# Altium PCB ADAS_ECU_MB_revA.PcbDoc (part 4 of 5)
Units mm, origin at the board's own origin, x right, y up, seen from the top; angles counter-clockwise.
Board outline 180 x 120 mm, 6 copper layers (Top Layer, Mid Layer 1, Mid Layer 2, Mid Layer 3, Mid Layer 4, Bottom Layer), stack 1.554 mm thick; 452 components, 370 nets, 4018 pads, 80 vias.
Unrouted connection lines stored in the file: 869.
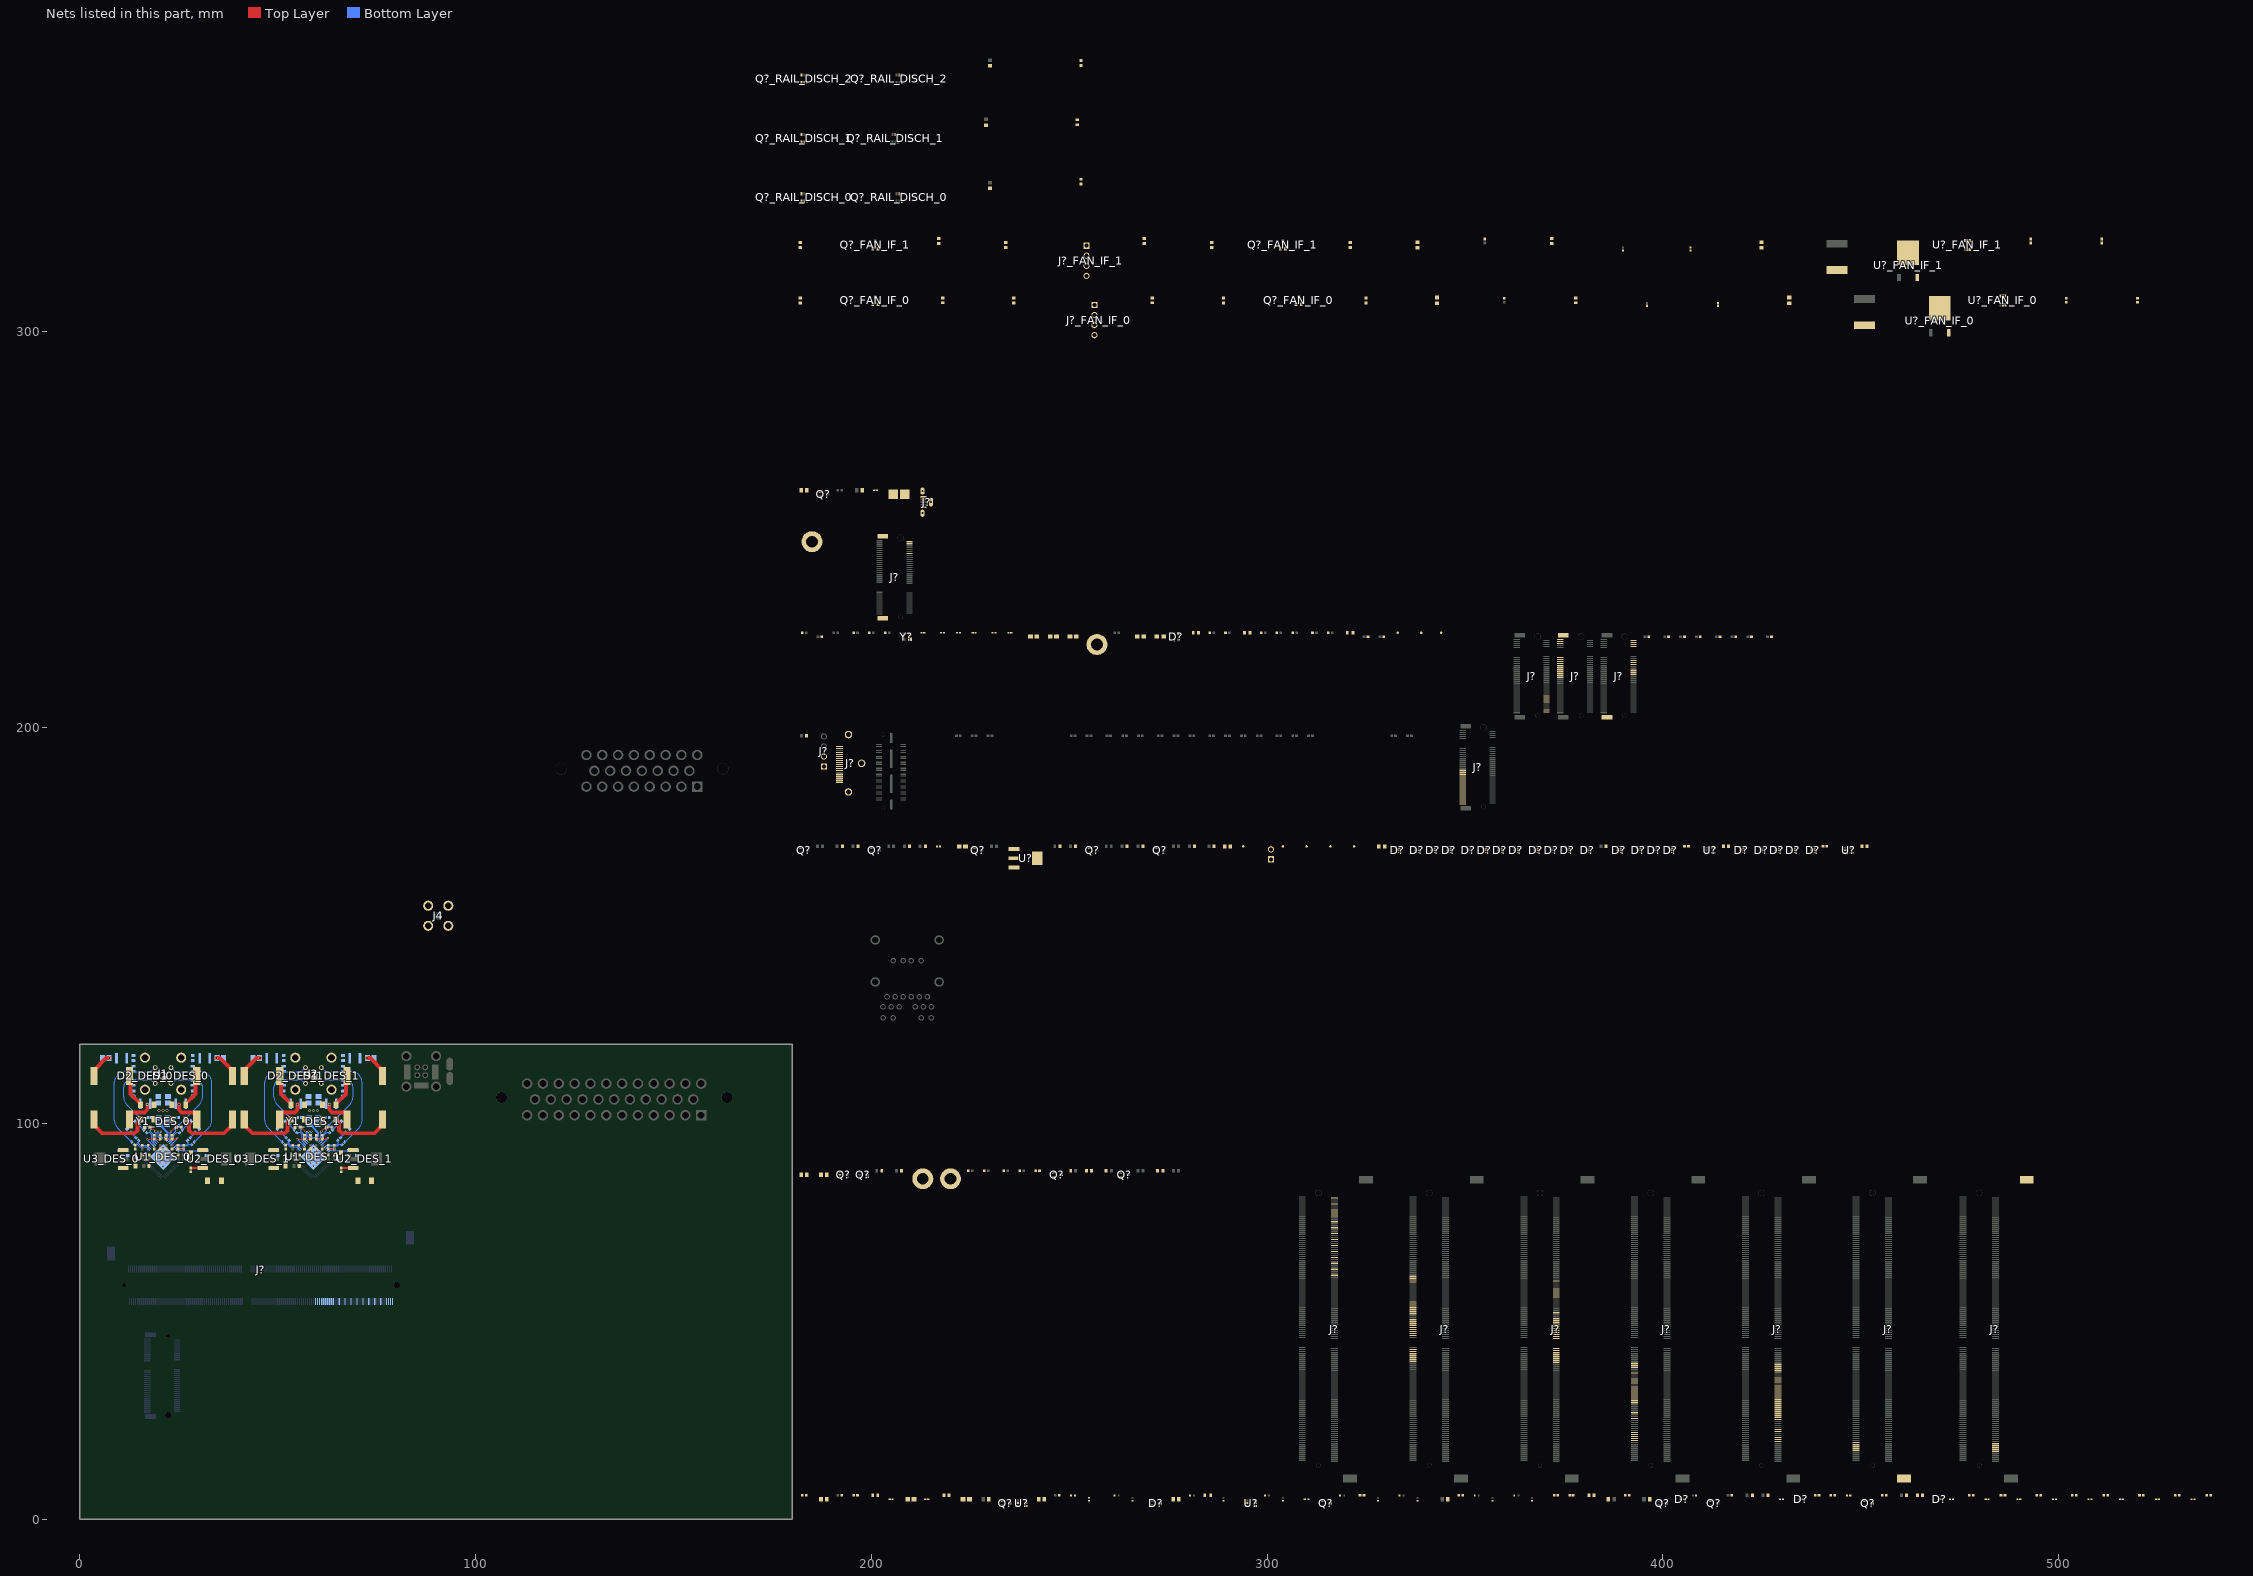
[diagram p3: the nets of this part, all layers, seen from the top]

## Via types
v1: diameter 0.5, hole 0.2, Top Layer to Bottom Layer, 32 vias
v2: diameter 0.5, hole 0.3, Top Layer to Bottom Layer, 30 vias
v3: diameter 0.7, hole 0.5, Top Layer to Bottom Layer, 16 vias
v4: diameter 1.2, hole 1.2, Top Layer to Bottom Layer, 2 vias

## Nets (pads, with @x,y where several pads share a name; then routed paths per layer and width w, separated by ;. In a path a pad name is that pad's centre, name@x,y a point inside that pad or via, vN(x,y) a via of type N, cw(c..) or ccw(c..) an arc to the next point about the centre after c; other vN are vias at no path point) (continued)
DES_3V3_DES_0: C11_DES_0.2 C11_DES_1.2 C13_DES_0.2 C13_DES_1.2 C27_DES_0.2 C27_DES_1.2 C28_DES_0.2 C28_DES_1.2 F5_DES_0.2 F5_DES_1.2 R2_DES_0.2 R2_DES_1.2 R5_DES_0.2 R5_DES_1.2 R6_DES_0.2 R6_DES_1.2 U1_DES_0.24 U1_DES_1.24 U2_DES_0.3 U2_DES_1.3 U3_DES_0.3 U3_DES_1.3 | length 12.9
  Top Layer w0.3: C27_DES_0.2@24.75,93.521 v2(26.25,93.521) ; C27_DES_1.2@62.75,93.521 v2(64.25,93.521)
  Top Layer w0.5: C11_DES_0.2@28,88.729 28.014,88.714 31.036,88.714 U2_DES_0.3@31.05,88.7 ; C11_DES_1.2@66,88.729 66.014,88.714 69.036,88.714 U2_DES_1.3@69.05,88.7
  Bottom Layer w0.254: U1_DES_0.24@24.624,93.356 25.018,93.75 25.955,93.75 26.183,93.521 v2(26.25,93.521) ; U1_DES_1.24@62.624,93.356 63.018,93.75 63.955,93.75 64.183,93.521 v2(64.25,93.521)
DP1_AUX_N: D?.4@375.583,168.5 D?.7@376.418,168.5 J?.98@373.1,57.125
DP1_AUX_P: D?.5@375.583,168 D?.6@376.418,168 J?.100@373.1,56.625
DP1_HPD: D?.2@375.583,169.5 D?.9@376.418,169.5 J?.96@373.1,57.625
DP1_TXD0_N: D?.1@432.583,170 D?.10@433.418,170 J?.63@63.5,55
DP1_TXD0_P: D?.2@432.583,169.5 D?.9@433.418,169.5 J?.65@63,55
DP1_TXD1_N: D?.4@432.583,168.5 D?.7@433.418,168.5 J?.69@62,55
DP1_TXD1_P: D?.5@432.583,168 D?.6@433.418,168 J?.71@61.5,55
DP1_TXD2_N: D?.1@401.583,170 D?.10@402.418,170 J?.75@60.5,55
DP1_TXD2_P: D?.2@401.583,169.5 D?.9@402.418,169.5 J?.77@60,55
DP1_TXD3_N: D?.4@401.583,168.5 D?.7@402.418,168.5 J?.81@336.9,61.375
DP1_TXD3_P: D?.5@401.583,168 D?.6@402.418,168 J?.83@336.9,60.875
DP_D0_N: C?.1@524.634,5
DP_D0_P: C?.1@533.634,5
DP_D1_N: C?.1@507.634,5
DP_D1_P: C?.1@515.634,5
DP_D2_N: C?.1@489.634,5
DP_D2_P: C?.1@498.634,5
DP_D3_N: C?.1@472.634,5
DP_D3_P: C?.1@481.634,5
DP_HDMI_CEC: D?.1@375.583,170 D?.10@376.418,170 J?.94@373.1,58.125
DP_HPD: Q?.3@400.95,4 R?.1@381.35,6
ENABLE_FAN_IF_0: R?_FAN_IF_0.1@378,307.375 R?_FAN_IF_0.2@520.001,308.5
ENABLE_FAN_IF_1: R?_FAN_IF_1.1@372,322.375 R?_FAN_IF_1.2@511.001,323.5
FAN_PWM_FAN_IF_0: R?_FAN_IF_0.1@218,307.375
FAN_PWM_FAN_IF_1: R?_FAN_IF_1.1@217,322.375
FAN_TACH_FAN_IF_0: R?_FAN_IF_0.1@271,307.375
FAN_TACH_FAN_IF_1: R?_FAN_IF_1.1@269,322.375
FAN_VCC_FAN_IF_0: J?_FAN_IF_0.2 U?_FAN_IF_0.2 U?_FAN_IF_0.3@486.65,306.875
FAN_VCC_FAN_IF_1: J?_FAN_IF_1.2 U?_FAN_IF_1.2 U?_FAN_IF_1.3@477.65,320.875
FAN_VDDIO_FAN_IF_0: C?.1@222.198,170 C?.1@405.522,170 C?.1@440.522,170 Q?.1@182.05,169.65 Q?.1@200.05,169.65 Q?.1@226.05,169.65 Q?.1@246.05,87.65 Q?.1@255.05,169.65 Q?.1@263.05,87.65 Q?.1@272.05,169.65 Q?_FAN_IF_0.1@307.35,307.05 Q?_FAN_IF_1.1@303.35,321.05 R?.1@182.5,6 R?.2@192.65,170 R?.2@197.725,260 R?.2@209.65,170 R?.2@247.65,170 R?.2@255.65,88 R?.2@264.65,170 R?.2@273.65,88 R?.2@281.65,170 R?.2@290.725,170 R?.2@295.65,224 R?.2@385.65,170 R?.2@416.65,170 R?.2@443.5,6 R?_FAN_IF_0.1@289,307.35 R?_FAN_IF_1.1@286,321.35 U?.2@236.05,167 U?.4@241.95,167 U?.5@412.771,169.65 U?.5@447.771,169.65
GBE_LED_ACT: J?.194@429.1,31.125
GBE_LED_LINK: J?.188@429.1,32.625
GBE_MDI0_N: D?.1@419.583,170 D?.10@420.418,170 J?.184@429.1,33.625
GBE_MDI0_P: D?.2@419.583,169.5 D?.9@420.418,169.5 J?.186@429.1,33.125
GBE_MDI1_N: D?.4@419.583,168.5 D?.7@420.418,168.5 J?.190@429.1,32.125
GBE_MDI1_P: D?.5@419.583,168 D?.6@420.418,168 J?.192@429.1,31.625
GBE_MDI2_N: D?.1@388.583,170 D?.10@389.418,170 J?.196@429.1,30.625
GBE_MDI2_P: D?.2@388.583,169.5 D?.9@389.418,169.5 J?.198@429.1,30.125
GBE_MDI3_N: D?.4@388.583,168.5 D?.7@389.418,168.5 J?.202@429.1,29.125
GBE_MDI3_P: D?.5@388.583,168 D?.6@389.418,168 J?.204@429.1,28.625
GND: C9_DES_0.1 C9_DES_1.1 C10_DES_0.1 C10_DES_1.1 C11_DES_0.1 C11_DES_1.1 C12_DES_0.2 C12_DES_1.2 C13_DES_0.1 C13_DES_1.1 C14_DES_0.2 C14_DES_1.2 C15_DES_0.1 C15_DES_1.1 C16_DES_0.1 C16_DES_1.1 C17_DES_0.1 C17_DES_1.1 C18_DES_0.1 C18_DES_1.1 C19_DES_0.1 C19_DES_1.1 C20_DES_0.1 C20_DES_1.1 C21_DES_0.1 C21_DES_1.1 C22_DES_0.1 C22_DES_1.1 C23_DES_0.1 C23_DES_1.1 C24_DES_0.1 C24_DES_1.1 C25_DES_0.1 C25_DES_1.1 C26_DES_0.1 C26_DES_1.1 C27_DES_0.1 C27_DES_1.1 C28_DES_0.1 C28_DES_1.1 C29_DES_0.1 C29_DES_1.1 C30_DES_0.1 C30_DES_1.1 C31_DES_0.2 C31_DES_1.2 C32_DES_0.2 C32_DES_1.2 C33_DES_0.2 C33_DES_1.2 C34_DES_0.2 C34_DES_1.2 C?.1@200.634,260 C?.1@204.634,5 C?.1@212.634,224 C?.1@213.634,5 C?.1@216.634,170 C?.1@217.634,224 C?.1@221.634,224 C?.1@225.634,224 C?.1@230.634,224 C?.1@234.634,224 C?.1@372.57,6 C?.1@376.57,6 C?.1@429.634,5 C?.2@187.479,223 C?.2@208.475,259 C?.2@210.802,5 C?.2@223.802,170 C?.2@224.802,5 C?.2@241.802,223 C?.2@246.802,223 C?.2@251.802,223 C?.2@310.475,5 C?.2@406.479,170 C?.2@408.4,6 C?.2@441.479,170 C?.2@447.4,6 C?_FAN_IF_0.1 C?_FAN_IF_1.1 D1_DES_0.3 D1_DES_0.8 D1_DES_1.3 D1_DES_1.8 D2_DES_0.3 D2_DES_0.8 D2_DES_1.3 D2_DES_1.8 D?.3@332.583,169 D?.3@337.583,169 D?.3@341.583,169 D?.3@345.583,169 D?.3@350.583,169 D?.3@354.583,169 D?.3@358.583,169 D?.3@362.583,169 D?.3@367.583,169 D?.3@371.583,169 D?.3@375.583,169 D?.3@380.583,169 D?.3@388.583,169 D?.3@393.583,169 D?.3@397.583,169 D?.3@401.583,169 D?.3@404.583,5 D?.3@419.583,169 D?.3@424.583,169 D?.3@428.583,169 D?.3@432.583,169 D?.3@434.583,5 D?.3@437.583,169 D?.3@469.583,5 D?.8 J1.MH1 J1.MH2 J1.MH3 J1.MH4 J1.MH5 J2.MH1 J2.MH2 J2.MH3 J2.MH4 J2.MH5 J4.2 J?.1@79,55 J?.1@188,190.19 J?.1@349.45,180.75 J?.2@191.92,194.71 J?.2@301,169.27 J?.2@317.1,81.125 J?.3@349.45,181.25 J?.5@191.92,193.21 J?.5@213.175,258.3 J?.6@212.925,254.2 J?.7@77.5,55 J?.7@212.925,259.8 J?.8@191.92,191.71 J?.8@215.075,257 J?.8@317.1,79.625 J?.9@349.45,182.75 J?.11@191.92,190.21 J?.13@76,55 J?.14@317.1,78.125 J?.15@349.45,184.25 J?.17@191.92,187.21 J?.19@74.5,55 J?.20@194.22,183.75 J?.20@317.1,76.625 J?.21@194.22,198.25 J?.21@349.45,185.75 J?.22@197.52,191 J?.25@73,55 J?.26@317.1,75.125 J?.27@349.45,187.25 J?.31@71.5,55 J?.32@317.1,73.625 J?.33@349.45,188.75 J?.37@70,55 J?.38@317.1,72.125 J?.39@374.1,213.25 J?.43@68.5,55 J?.44@317.1,70.625 J?.45@374.1,214.75 J?.49@67,55 J?.50@317.1,69.125 J?.51@374.1,216.25 J?.55@65.5,55 J?.56@317.1,67.625 J?.57@374.1,217.75 J?.61@64,55 J?.62@317.1,66.125 J?.67@62.5,55 J?.68@317.1,64.625 J?.71@374.1,221.25 J?.73@61,55 J?.73@374.1,221.75 J?.74@317.1,63.125 J?.75@374.1,222.25 J?.76@202.875,227.65 J?.76@385.875,202.65 J?.77@202.875,248.35 J?.77@374.875,223.35 J?.79@59.5,55 J?.80@317.1,61.625 J?.85@336.9,60.375 J?.86@373.1,60.125 J?.102@373.1,56.125 J?.107@336.9,54.875 J?.113@336.9,53.375 J?.119@336.9,51.875 J?.125@336.9,50.375 J?.129@336.9,49.375 J?.132@373.1,48.625 J?.135@336.9,47.875 J?.138@373.1,47.125 J?.141@336.9,46.375 J?.144@373.1,45.625 J?.146@373.1,43.125 J?.147@336.9,42.875 J?.152@373.1,41.625 J?.153@336.9,41.375 J?.158@373.1,40.125 J?.159@336.9,39.875 J?.164@429.1,38.625 J?.165@392.9,38.375 J?.170@429.1,37.125 J?.171@392.9,36.875 J?.176@429.1,35.625 J?.177@392.9,35.375 J?.200@429.1,29.625 J?.201@392.9,29.375 J?.231@392.9,21.875 J?.241@448.9,19.375 J?.242@484.101,19.125 J?.243@448.9,18.875 J?.244@484.101,18.625 J?.245@448.9,18.375 J?.246@484.101,18.125 J?.247@448.9,17.875 J?.248@484.101,17.625 J?.249@448.9,17.375 J?.250@484.101,17.125 J?.261@461,10.25 J?.262@492.001,85.75 J?_FAN_IF_0.1 J?_FAN_IF_1.1 MP?.1 Q?.1@192.05,87.65 Q?.2@187.05,258.35 Q?.2@233.05,3.35 Q?.2@399.05,3.35 Q?.4@198.95,86.35 Q?_FAN_IF_0.2@201.65,307.05 Q?_FAN_IF_1.2@201.65,321.05 Q?_RAIL_DISCH_0.1@182.35,333.05 Q?_RAIL_DISCH_0.4@207.65,334.95 Q?_RAIL_DISCH_1.1@182.35,348.05 Q?_RAIL_DISCH_1.4@206.65,349.95 Q?_RAIL_DISCH_2.1@182.35,363.05 Q?_RAIL_DISCH_2.4@207.65,364.95 R1_DES_0.1 R1_DES_1.1 R3_DES_0.1 R3_DES_1.1 R4_DES_0.1 R4_DES_1.1 R7_DES_0.1 R7_DES_1.1 R8_DES_0.1 R8_DES_1.1 R9_DES_0.1 R9_DES_1.1 R10_DES_0.1 R10_DES_1.1 R11_DES_0.1 R11_DES_1.1 R?.1@182.5,224 R?.1@182.275,87 R?.1@182.275,260 R?.1@187.275,5 R?.1@187.275,87 R?.1@195.5,224 R?.1@218.35,6 R?.1@242.275,5 R?.1@267.15,223 R?.1@272.15,223 R?.1@328.275,170 R?.1@386.275,5 R?.2@192.5,6 R?.2@242.5,88 R?.2@247.5,6 R?_FAN_IF_0.1@343,307.275 R?_FAN_IF_0.2@182,308.65 R?_FAN_IF_0.2@360,308.5 R?_FAN_IF_1.1@338,321.275 R?_FAN_IF_1.2@182,322.65 R?_FAN_IF_1.2@355,323.5 U1_DES_0.57 U1_DES_1.57 U2_DES_0.1 U2_DES_1.1 U3_DES_0.1 U3_DES_1.1 U?.1@236.05,169.3 U?.3@411.23,168.35 U?.3@446.23,168.35 U?_FAN_IF_0.4@470,306 U?_FAN_IF_1.4@462,320 Y1_DES_0.2 Y1_DES_0.4 Y1_DES_1.2 Y1_DES_1.4 Y?.2
  other v1: 21,89.167 59,89.167 20.222,89.944 21.778,89.944 58.222,89.944 59.778,89.944 19.444,90.722 21,90.722 22.556,90.722 57.444,90.722 59,90.722 60.556,90.722 18.667,91.5 20.222,91.5 21.778,91.5 23.333,91.5 56.667,91.5 58.222,91.5 59.778,91.5 61.333,91.5 19.444,92.278 21,92.278 22.556,92.278 57.444,92.278 59,92.278 60.556,92.278 20.222,93.056 21.778,93.056 58.222,93.056 59.778,93.056 21,93.833 59,93.833
GPIO08_FAN_TACH: J?.208@429.1,27.625
GPIO10_nSMB_ALERT: J?.212@429.1,26.625 R?.1@415.35,170 U?.4@412.771,168.35
GPIO14_FAN_PWM: J?.230@429.1,22.125
GPIO_01: J?.118@373.1,52.125
GPIO_02: J?.124@373.1,50.625
GPIO_03: J?.126@373.1,50.125
GPIO_04: J?.127@336.9,49.875
GPIO_05: J?.128@373.1,49.625
GPIO_06: J?.130@373.1,49.125
GPIO_07: J?.206@429.1,28.125
GPIO_09: J?.211@392.9,26.875
GPIO_11: J?.216@429.1,25.625
GPIO_12: J?.218@429.1,25.125
GPIO_13: J?.228@429.1,22.625
HDMI_1V8: R?.2@183.5,6 R?.2@196.5,6 R?.2@382.65,6
HDMI_CEC: C?.1@309.525,5 D?.1@404.583,6 D?.10@405.418,6 J?.13@191.92,189.21 R?.2@324.5,6
HDMI_CLK_N: D?.5@434.583,4 D?.6@435.418,4 J?.12@191.92,189.71 R?.2@478.5,6
HDMI_CLK_P: D?.4@434.583,4.5 D?.7@435.418,4.5 J?.10@191.92,190.71 R?.2@486.501,6
HDMI_D0_N: D?.2@434.583,5.5 D?.9@435.418,5.5 J?.9@191.92,191.21 R?.2@495.501,6
HDMI_D0_P: D?.1@434.583,6 D?.10@435.418,6 J?.7@191.92,192.21 R?.2@504.501,6
HDMI_D1_N: D?.5@469.583,4 D?.6@470.418,4 J?.6@191.92,192.71 R?.2@512.501,6
HDMI_D1_P: D?.4@469.583,4.5 D?.7@470.418,4.5 J?.4@191.92,193.71 R?.2@521.501,6
HDMI_D2_N: D?.2@469.583,5.5 D?.9@470.418,5.5 R?.2@530.501,6
HDMI_D2_P: D?.1@469.583,6 D?.10@470.418,6 J?.1@191.92,195.21 R?.2@538.501,6
HDMI_HP_DET: C?.2@377.43,6 D?.5@404.583,4 D?.6@405.418,4 J?.19@191.92,186.21 R?.2@391.5,6
HDMI_nSLEEP: R?.2@243.725,5 U?.5@297.125,4
HDMI_SCL: D?.2@404.583,5.5 D?.9@405.418,5.5 J?.15@191.92,188.21 R?.2@417.5,6
HDMI_SDA: D?.4@404.583,4.5 D?.7@405.418,4.5 J?.16@191.92,187.71 R?.2@456.5,6
I2C0_SCL: D?.4@354.583,168.5 D?.7@355.418,168.5 J?.185@392.9,33.375
I2C0_SDA: D?.5@354.583,168 D?.6@355.418,168 J?.187@392.9,32.875
I2C1_SCL: J?.189@392.9,32.375
I2C1_SDA: J?.191@392.9,31.875
I2C_IO_VCC: C?.2@430.367,5 Q?.1@412.05,4.65 Q?.1@451.05,4.65 R?.1@438.5,6 R?.1@442.5,6 R?.2@422.65,6 R?.2@461.65,6
I2S0_DIN: D?.2@332.583,169.5 D?.9@333.418,169.5 J?.195@392.9,30.875 TP?.1@322,170
I2S0_DOUT: D?.1@332.583,170 D?.10@333.418,170 J?.193@392.9,31.375 TP?.1@316,170
I2S0_FS: D?.4@332.583,168.5 D?.7@333.418,168.5 J?.197@392.9,30.375 TP?.1@304,170
I2S0_SCLK: D?.5@332.583,168 D?.6@333.418,168 J?.199@392.9,29.875 TP?.1@294,170
INT_VCC: F?_FAN_IF_0.1 F?_FAN_IF_1.1
MFP6_DES_0: R5_DES_0.1 R7_DES_0.2 U1_DES_0.25 | length 7.3
  Bottom Layer w0.2: U1_DES_0.25@24.977,93.003 25.225,93.25 25.733,93.25 25.962,93.021 27.729,93.021 29.871,93.021 R7_DES_0.2@30,93.15 R5_DES_0.1@32,93.15
MFP6_DES_1: R5_DES_1.1 R7_DES_1.2 U1_DES_1.25 | length 7.3
  Bottom Layer w0.2: U1_DES_1.25@62.977,93.003 63.225,93.25 63.733,93.25 63.962,93.021 65.729,93.021 67.871,93.021 R7_DES_1.2@68,93.15 R5_DES_1.1@70,93.15
MODULE_ID: J?.217@392.9,25.375 R?.1@241.5,88
nERRB_DES_0: U1_DES_0.14 | length 1.7
  Bottom Layer w0.2: v2(20.5,98) 20.5,97.919 20.25,97.669 20.25,96.86 20.558,96.552 U1_DES_0.14@20.558,96.538
nERRB_DES_1: U1_DES_1.14 | length 1.7
  Bottom Layer w0.2: v2(58.5,98) 58.5,97.919 58.25,97.669 58.25,96.86 58.558,96.552 U1_DES_1.14@58.558,96.538
NetC3_DES_0_2: C3_DES_0.2 R3_DES_0.2 | length 1.9
  Bottom Layer w0.199: C3_DES_0.2@27.838,96.338 R3_DES_0.2@29.162,97.662
NetC3_DES_1_2: C3_DES_1.2 R3_DES_1.2 | length 1.9
  Bottom Layer w0.199: C3_DES_1.2@65.838,96.338 R3_DES_1.2@67.162,97.662
NetC4_DES_0_2: C4_DES_0.2 R4_DES_0.2 | length 1.9
  Bottom Layer w0.199: C4_DES_0.2@25.838,98.338 R4_DES_0.2@27.162,99.662
NetC4_DES_1_2: C4_DES_1.2 R4_DES_1.2 | length 1.9
  Bottom Layer w0.199: C4_DES_1.2@63.838,98.338 R4_DES_1.2@65.162,99.662
NetC7_DES_0_2: C7_DES_0.2 R9_DES_0.2 | length 1.9
  Bottom Layer w0.199: R9_DES_0.2@14.838,99.662 C7_DES_0.2@16.162,98.338
NetC7_DES_1_2: C7_DES_1.2 R9_DES_1.2 | length 1.9
  Bottom Layer w0.199: R9_DES_1.2@52.838,99.662 C7_DES_1.2@54.162,98.338
NetC8_DES_0_2: C8_DES_0.2 R10_DES_0.2 | length 1.9
  Bottom Layer w0.199: R10_DES_0.2@12.838,97.662 C8_DES_0.2@14.162,96.338
NetC8_DES_1_2: C8_DES_1.2 R10_DES_1.2 | length 1.9
  Bottom Layer w0.199: R10_DES_1.2@50.838,97.662 C8_DES_1.2@52.162,96.338
NetC15_DES_0_2: C15_DES_0.2 C16_DES_0.2 U1_DES_0.8 | length 5.4
  Top Layer w0.3: v2(17,96) 17.011,96.011 20.239,96.011 C15_DES_0.2@20.25,96.021
  Bottom Layer w0.254: v2(17,96) 17.047,95.953 17.047,95.806 U1_DES_0.8@18.437,94.417
NetC15_DES_1_2: C15_DES_1.2 C16_DES_1.2 U1_DES_1.8 | length 5.4
  Top Layer w0.3: v2(55,96) 55.011,96.011 58.239,96.011 C15_DES_1.2@58.25,96.021
  Bottom Layer w0.254: v2(55,96) 55.047,95.953 55.047,95.806 U1_DES_1.8@56.437,94.417
NetC17_DES_0_2: C17_DES_0.2 C18_DES_0.2 U1_DES_0.20 | length 5.2
  Top Layer w0.3: C17_DES_0.2@21.75,96.021 24.036,96.021 24.277,96.262 24.662,96.262 v2(24.7,96.3)
  Bottom Layer w0.254: U1_DES_0.20@23.21,94.77 23.21,94.773 24.7,96.263 v2(24.7,96.3)
NetC17_DES_1_2: C17_DES_1.2 C18_DES_1.2 U1_DES_1.20 | length 5.2
  Top Layer w0.3: C17_DES_1.2@59.75,96.021 62.036,96.021 62.277,96.262 62.662,96.262 v2(62.7,96.3)
  Bottom Layer w0.254: U1_DES_1.20@61.21,94.77 61.21,94.773 62.7,96.263 v2(62.7,96.3)
NetC31_DES_0_1: C31_DES_0.1 L1_DES_0.2 L2_DES_0.1 R12_DES_0.2 | length 6.7
  Top Layer w1: v3(34.5,116.5) 35.4,116.5 38.5,113.4 L1_DES_0.2@38.5,112
NetC31_DES_1_1: C31_DES_1.1 L1_DES_1.2 L2_DES_1.1 R12_DES_1.2 | length 6.7
  Top Layer w1: v3(72.5,116.5) 73.4,116.5 76.5,113.4 L1_DES_1.2@76.5,112
NetC32_DES_0_1: C32_DES_0.1 L4_DES_0.2 L5_DES_0.1 R13_DES_0.2 | length 7.6
  Top Layer w1: v3(25,104.75) 25,103.5 25.7,102.8 29.1,102.8 29.5,102.4 L4_DES_0.2@29.5,101
NetC32_DES_1_1: C32_DES_1.1 L4_DES_1.2 L5_DES_1.1 R13_DES_1.2 | length 7.6
  Top Layer w1: v3(63,104.75) 63,103.5 63.7,102.8 67.1,102.8 67.5,102.4 L4_DES_1.2@67.5,101
NetC33_DES_0_1: C33_DES_0.1 L7_DES_0.2 L8_DES_0.1 R14_DES_0.2 | length 6.7
  Top Layer w1: L7_DES_0.2@3.5,112 3.5,113.4 6.6,116.5 v3(7.5,116.5)
NetC33_DES_1_1: C33_DES_1.1 L7_DES_1.2 L8_DES_1.1 R14_DES_1.2 | length 6.7
  Top Layer w1: L7_DES_1.2@41.5,112 41.5,113.4 44.6,116.5 v3(45.5,116.5)
NetC34_DES_0_1: C34_DES_0.1 L10_DES_0.2 L11_DES_0.1 R15_DES_0.2 | length 7.6
  Top Layer w1: L10_DES_0.2@12.5,101 12.5,102.4 12.9,102.8 16.3,102.8 17,103.5 v3(17,104.75)
NetC34_DES_1_1: C34_DES_1.1 L10_DES_1.2 L11_DES_1.1 R15_DES_1.2 | length 7.6
  Top Layer w1: L10_DES_1.2@50.5,101 50.5,102.4 50.9,102.8 54.3,102.8 55,103.5 v3(55,104.75)
NetC?_1: C?.1@446.6,6 Q?.3@452.95,4 R?.1@455.5,6 R?.1@464.375,6
NetC?_2: C?.2@373.43,6 R?.1@390.5,6 R?.2@396.725,5
NetC?_FAN_IF_0_2: C?_FAN_IF_0.2@414,307.367 R?_FAN_IF_0.1@502.001,307.5 R?_FAN_IF_0.2@432,308.725 U?_FAN_IF_0.3@472.28,299.8 U?_FAN_IF_0.4@486.65,309.125
NetC?_FAN_IF_1_2: C?_FAN_IF_1.2@407,321.367 R?_FAN_IF_1.1@493.001,322.5 R?_FAN_IF_1.2@425,322.725 U?_FAN_IF_1.3@464.28,313.8 U?_FAN_IF_1.4@477.65,323.125
NetD?_1: D?.1@276.55,223.8 R?.2@273.85,223
NetD?_2: D?.2@271.05,3.35 R?.1@284.275,6
NetD?_3: D?.3@272.95,4 Q?.3@315.95,4 R?.1@323.5,6
NetD?_4: D?.4@277.45,223.8 R?.2@268.85,223
NetF1_DES_0_2: F1_DES_0.2 L1_DES_0.1 | length 8.4
  Top Layer w1: F1_DES_0.2@26.725,104.75 26.725,104.95 29.239,107.464 29.239,111.739 L1_DES_0.1@29.5,112
NetF1_DES_1_2: F1_DES_1.2 L1_DES_1.1 | length 8.4
  Top Layer w1: F1_DES_1.2@64.725,104.75 64.725,104.95 67.239,107.464 67.239,111.739 L1_DES_1.1@67.5,112
NetF2_DES_0_2: F2_DES_0.2 L4_DES_0.1 | length 16.7
  Top Layer w1: F2_DES_0.2@26.725,101 26.725,100.8 26.85,100.675 26.914,100.675 27.5,100.089 27.5,98.25 28.25,97.5 36.4,97.5 38.5,99.6 L4_DES_0.1@38.5,101
NetF2_DES_1_2: F2_DES_1.2 L4_DES_1.1 | length 16.7
  Top Layer w1: F2_DES_1.2@64.725,101 64.725,100.8 64.85,100.675 64.914,100.675 65.5,100.089 65.5,98.25 66.25,97.5 74.4,97.5 76.5,99.6 L4_DES_1.1@76.5,101
NetF3_DES_0_2: F3_DES_0.2 L7_DES_0.1 | length 8.4
  Top Layer w1: L7_DES_0.1@12.5,112 12.761,111.739 12.761,107.464 15.275,104.95 F3_DES_0.2@15.275,104.75
NetF3_DES_1_2: F3_DES_1.2 L7_DES_1.1 | length 8.4
  Top Layer w1: L7_DES_1.1@50.5,112 50.761,111.739 50.761,107.464 53.275,104.95 F3_DES_1.2@53.275,104.75
NetF4_DES_0_2: F4_DES_0.2 L10_DES_0.1 | length 16.7
  Top Layer w1: L10_DES_0.1@3.5,101 3.5,99.6 5.6,97.5 13.75,97.5 14.5,98.25 14.5,100.089 15.086,100.675 15.15,100.675 15.275,100.8 F4_DES_0.2@15.275,101
NetF4_DES_1_2: F4_DES_1.2 L10_DES_1.1 | length 16.7
  Top Layer w1: L10_DES_1.1@41.5,101 41.5,99.6 43.6,97.5 51.75,97.5 52.5,98.25 52.5,100.089 53.086,100.675 53.15,100.675 53.275,100.8 F4_DES_1.2@53.275,101
NetFB?_1: FB?.1 Q?.3@234.95,4
NetFB?_2: FB?.2@255,5.4 R?.2@251.513,6
NetJ?_2: J?.2@188,192.73 R?.2@183.625,198
NetJ?_62: J?.62@209.65,244
NetJ?_68: J?.68@392.65,220.5 R?.1@320.275,224
NetL2_DES_0_2: L2_DES_0.2 L3_DES_0.1 R12_DES_0.1
NetL2_DES_1_2: L2_DES_1.2 L3_DES_1.1 R12_DES_1.1
NetL5_DES_0_2: L5_DES_0.2 L6_DES_0.1 R13_DES_0.1
NetL5_DES_1_2: L5_DES_1.2 L6_DES_1.1 R13_DES_1.1
NetL8_DES_0_2: L8_DES_0.2 L9_DES_0.1 R14_DES_0.1
NetL8_DES_1_2: L8_DES_1.2 L9_DES_1.1 R14_DES_1.1
NetL11_DES_0_2: L11_DES_0.2 L12_DES_0.1 R15_DES_0.1
NetL11_DES_1_2: L11_DES_1.2 L12_DES_1.1 R15_DES_1.1
NetQ?_1: Q?.1@314.05,4.65 R?.2@345.725,5 R?.2@349.5,6
NetQ?_2: Q?.2@192.05,87 R?.2@183.725,87 R?.2@202.625,88
NetQ?_3: Q?.3@247.95,87 R?.1@250.375,88 R?.1@259.35,88
NetQ?_5: Q?.5@198.95,87 R?.2@188.725,87 R?.2@207.625,88
NetQ?_FAN_IF_0_1: Q?_FAN_IF_0.1@200.35,307.05 R?_FAN_IF_0.1@182,307.35 R?_FAN_IF_0.2@218,308.625
NetQ?_FAN_IF_0_2: Q?_FAN_IF_0.2@308.65,307.05 R?_FAN_IF_0.2@271,308.625 R?_FAN_IF_0.2@289,308.65
NetQ?_FAN_IF_1_1: Q?_FAN_IF_1.1@200.35,321.05 R?_FAN_IF_1.1@182,321.35 R?_FAN_IF_1.2@217,323.625
NetQ?_FAN_IF_1_2: Q?_FAN_IF_1.2@304.65,321.05 R?_FAN_IF_1.2@269,323.625 R?_FAN_IF_1.2@286,322.65
NetQ?_RAIL_DISCH_0_3: Q?_RAIL_DISCH_0.3@207.65,333.05 R?_RAIL_DISCH_0.1@253,337.375
NetQ?_RAIL_DISCH_0_5: Q?_RAIL_DISCH_0.5@207,334.95 Q?_RAIL_DISCH_0.6@182.35,334.95 R?_RAIL_DISCH_0.1@230,336.275
NetQ?_RAIL_DISCH_1_3: Q?_RAIL_DISCH_1.3@206.65,348.05 R?_RAIL_DISCH_1.1@252,352.375
NetQ?_RAIL_DISCH_1_5: Q?_RAIL_DISCH_1.5@206,349.95 Q?_RAIL_DISCH_1.6@182.35,349.95 R?_RAIL_DISCH_1.1@229,352.275
NetQ?_RAIL_DISCH_2_3: Q?_RAIL_DISCH_2.3@207.65,363.05 R?_RAIL_DISCH_2.1@253,367.375
NetQ?_RAIL_DISCH_2_5: Q?_RAIL_DISCH_2.5@207,364.95 Q?_RAIL_DISCH_2.6@182.35,364.95 R?_RAIL_DISCH_2.1@230,367.275
NetR1_DES_0_2: R1_DES_0.2 U1_DES_0.17 | length 4.3
  Top Layer w0.2: v2(23,98) 23.65,98.65 24.05,98.65 24.35,98.95 R1_DES_0.2@24.35,99
  Bottom Layer w0.2: U1_DES_0.17@22.149,95.831 22.8,96.482 22.8,97.733 23,97.933 v2(23,98)
NetR1_DES_1_2: R1_DES_1.2 U1_DES_1.17 | length 4.3
  Top Layer w0.2: v2(61,98) 61.65,98.65 62.05,98.65 62.35,98.95 R1_DES_1.2@62.35,99
  Bottom Layer w0.2: U1_DES_1.17@60.149,95.831 60.8,96.482 60.8,97.733 61,97.933 v2(61,98)
NetR?_1: R?.1@276.275,5 U?.6@297.125,4.65
NetR?_2: R?.2@188.725,5 R?.2@201.625,6 U?.5@239.125,4
NetR?_FAN_IF_0_1: R?_FAN_IF_0.1@432,307.275 U?_FAN_IF_0.6
NetR?_FAN_IF_0_2: R?_FAN_IF_0.2@343,308.725 R?_FAN_IF_0.2@378,308.625 U?_FAN_IF_0.5
NetR?_FAN_IF_1_1: R?_FAN_IF_1.1@425,321.275 U?_FAN_IF_1.6
NetR?_FAN_IF_1_2: R?_FAN_IF_1.2@338,322.725 R?_FAN_IF_1.2@372,323.625 U?_FAN_IF_1.5
nFORCE_RECOVERY: J?.1@301,166.73 J?.214@429.1,26.125 R?.1@289.275,170
nLOCK_DES_0: U1_DES_0.13 | length 2
  Bottom Layer w0.2: v2(19.75,98) 19.75,96.639 U1_DES_0.13@20.205,96.185
nLOCK_DES_1: U1_DES_1.13 | length 2
  Bottom Layer w0.2: v2(57.75,98) 57.75,96.639 U1_DES_1.13@58.205,96.185
nMOD_SLEEP: J?.178@429.1,35.125
nPWDN_DES_0: R2_DES_0.1 U1_DES_0.11 | length 4.5
  Top Layer w0.2: R2_DES_0.1@17.65,99 17.65,98.95 17.95,98.65 18.35,98.65 v2(19,98)
  Bottom Layer w0.2: v2(19,98) 19,97.919 19.25,97.669 19.25,95.725 U1_DES_0.11@19.497,95.477
nPWDN_DES_1: R2_DES_1.1 U1_DES_1.11 | length 4.5
  Top Layer w0.2: R2_DES_1.1@55.65,99 55.65,98.95 55.95,98.65 56.35,98.65 v2(57,98)
  Bottom Layer w0.2: v2(57,98) 57,97.919 57.25,97.669 57.25,95.725 U1_DES_1.11@57.497,95.477
nSHUTDOWN_REQ: J?.233@392.9,21.375
nSYS_RESET: J?.239@392.9,19.875
PCIE0_CLK_N: D?.1@345.583,170 D?.10@346.418,170 J?.160@373.1,39.625
PCIE0_CLK_P: D?.2@345.583,169.5 D?.9@346.418,169.5 J?.162@429.1,39.125
PCIE0_nCLKREQ: J?.180@429.1,34.625
PCIE0_nRST: D?.2@354.583,169.5 D?.9@355.418,169.5 J?.181@392.9,34.375
PCIE0_RX0_N: D?.1@358.583,170 D?.10@359.418,170 J?.131@336.9,48.875
PCIE0_RX0_P: D?.2@358.583,169.5 D?.9@359.418,169.5 J?.133@336.9,48.375
PCIE0_RX1_N: D?.4@358.583,168.5 D?.7@359.418,168.5 J?.137@336.9,47.375
PCIE0_RX1_P: D?.5@358.583,168 D?.6@359.418,168 J?.139@336.9,46.875
PCIE0_RX2_N: D?.4@337.583,168.5 D?.7@338.418,168.5 J?.149@336.9,42.375
PCIE0_RX2_P: D?.5@337.583,168 D?.6@338.418,168 J?.151@336.9,41.875
PCIE0_RX3_N: D?.1@341.583,170 D?.10@342.418,170 J?.155@336.9,40.875
PCIE0_RX3_P: D?.2@341.583,169.5 D?.9@342.418,169.5 J?.157@336.9,40.375
PCIE0_TX0_N: D?.1@367.583,170 D?.10@368.418,170 J?.134@373.1,48.125
PCIE0_TX0_P: D?.2@367.583,169.5 D?.9@368.418,169.5 J?.136@373.1,47.625
PCIE0_TX1_N: D?.4@367.583,168.5 D?.7@368.418,168.5 J?.140@373.1,46.625
PCIE0_TX1_P: D?.5@367.583,168 D?.6@368.418,168 J?.142@373.1,46.125
PCIE0_TX2_N: D?.1@362.583,170 D?.10@363.418,170 J?.148@373.1,42.625
PCIE0_TX2_P: D?.2@362.583,169.5 D?.9@363.418,169.5 J?.150@373.1,42.125
PCIE0_TX3_N: D?.4@362.583,168.5 D?.7@363.418,168.5 J?.154@373.1,41.125
PCIE0_TX3_P: D?.5@362.583,168 D?.6@363.418,168 J?.156@373.1,40.625
PCIE_32K_CLK: R?.1@450.35,170 U?.4@447.771,168.35
PCIE_CLKREQ: J?.52@392.65,216.5 R?.1@311.5,224
PCIE_RST: J?.50@392.65,216 R?.1@281.35,224 R?.1@315.5,224
PCIE_RX0_N: J?.41@374.1,213.75
PCIE_RX0_P: J?.43@374.1,214.25
PCIE_RX1_N: J?.29@349.45,187.75
PCIE_RX1_P: J?.31@349.45,188.25
PCIE_RX2_N: J?.17@349.45,184.75
PCIE_RX2_P: J?.19@349.45,185.25
PCIE_RX3_N: J?.5@349.45,181.75
PCIE_RX3_P: J?.7@349.45,182.25
PCIE_WAKE: D?.1@354.583,170 D?.10@355.418,170 J?.179@392.9,34.875
PLDWN_1: C?.2@534.367,5 R?.1@362.488,6 R?.1@537.501,6
PLDWN_2: C?.2@525.367,5 R?.1@352.488,6 R?.1@529.501,6
PLDWN_3: C?.2@516.367,5 R?.1@333.488,6 R?.1@520.501,6
PLDWN_4: C?.2@508.367,5 R?.1@318.488,6 R?.1@511.501,6
PLDWN_5: C?.2@499.367,5 R?.1@299.488,6 R?.1@503.501,6
PLDWN_6: C?.2@490.367,5 R?.1@280.488,6 R?.1@494.501,6
PLDWN_7: C?.2@482.367,5 R?.1@261.488,6 R?.1@485.501,6
PLDWN_8: C?.2@473.367,5 R?.1@250.488,6 R?.1@477.5,6
PMIC_BBAT: J?.235@392.9,20.875 TP?.1@310,170
PoC_A_DES_0: C1_DES_0.2 D1_DES_0.1 D1_DES_0.10 J1.2 L3_DES_0.2 | length 29
  Bottom Layer w0.199: J1.2@23,114.09 23.388,113.702 ccw(c25.083,115.396) D1_DES_0.10@25.083,113 D1_DES_0.1@25.918,113 28.222,113 ccw(c28.222,113.393) L3_DES_0.2@28.5,113.115 30.533,113.115 cw(c30.533,110.575) 32.329,112.371 32.556,112.144 cw(c30.76,110.348) 33.3,110.348 33.3,100.731 cw(c30.76,100.731) 32.556,98.935 C1_DES_0.2@28.899,95.278
PoC_A_DES_1: C1_DES_1.2 D1_DES_1.1 D1_DES_1.10 J2.2 L3_DES_1.2 | length 29
  Bottom Layer w0.199: J2.2@61,114.09 61.388,113.702 ccw(c63.083,115.396) D1_DES_1.10@63.083,113 D1_DES_1.1@63.918,113 66.222,113 ccw(c66.222,113.393) L3_DES_1.2@66.5,113.115 68.533,113.115 cw(c68.533,110.575) 70.329,112.371 70.556,112.144 cw(c68.76,110.348) 71.3,110.348 71.3,100.731 cw(c68.76,100.731) 70.556,98.935 C1_DES_1.2@66.899,95.278
PoC_B_DES_0: C2_DES_0.2 D1_DES_0.5 D1_DES_0.6 J1.1 L6_DES_0.2 | length 21.5
  Bottom Layer w0.199: J1.1@23,110.09 23.166,110.256 cw(c24.962,108.46) 24.962,111 D1_DES_0.6@25.083,111 D1_DES_0.5@25.918,111 28.222,111 cw(c28.222,110.607) L6_DES_0.2@28.5,110.885 29.371,110.885 cw(c29.371,109.329) 30.47,110.43 30.472,110.428 cw(c29.193,109.151) 31,109.151 31,106.673 cw(c28.46,106.673) 30.256,104.877 C2_DES_0.2@24.778,99.399
PoC_B_DES_1: C2_DES_1.2 D1_DES_1.5 D1_DES_1.6 J2.1 L6_DES_1.2 | length 21.5
  Bottom Layer w0.199: J2.1@61,110.09 61.166,110.256 cw(c62.962,108.46) 62.962,111 D1_DES_1.6@63.083,111 D1_DES_1.5@63.918,111 66.222,111 cw(c66.222,110.607) L6_DES_1.2@66.5,110.885 67.371,110.885 cw(c67.371,109.329) 68.47,110.43 68.472,110.428 cw(c67.193,109.151) 69,109.151 69,106.673 cw(c66.46,106.673) 68.256,104.877 C2_DES_1.2@62.778,99.399
PoC_C_DES_0: C5_DES_0.2 D2_DES_0.1 D2_DES_0.10 J1.4 L12_DES_0.2 | length 21.5
  Bottom Layer w0.199: C5_DES_0.2@17.222,99.399 11.744,104.877 cw(c13.54,106.673) 11,106.673 11,109.151 cw(c12.807,109.151) 11.528,110.428 11.53,110.43 cw(c12.629,109.329) 12.629,110.885 L12_DES_0.2@13.5,110.885 cw(c13.778,110.607) 13.778,111 D2_DES_0.1@16.083,111 D2_DES_0.10@16.918,111 17.038,111 cw(c17.038,108.46) 18.834,110.256 J1.4@19,110.09
PoC_C_DES_1: C5_DES_1.2 D2_DES_1.1 D2_DES_1.10 J2.4 L12_DES_1.2 | length 21.5
  Bottom Layer w0.199: C5_DES_1.2@55.222,99.399 49.744,104.877 cw(c51.54,106.673) 49,106.673 49,109.151 cw(c50.807,109.151) 49.528,110.428 49.53,110.43 cw(c50.629,109.329) 50.629,110.885 L12_DES_1.2@51.5,110.885 cw(c51.778,110.607) 51.778,111 D2_DES_1.1@54.083,111 D2_DES_1.10@54.918,111 55.038,111 cw(c55.038,108.46) 56.834,110.256 J2.4@57,110.09
PoC_D_DES_0: C6_DES_0.2 D2_DES_0.5 D2_DES_0.6 J1.3 L9_DES_0.2 | length 29
  Bottom Layer w0.199: C6_DES_0.2@13.101,95.278 9.444,98.935 cw(c11.24,100.731) 8.7,100.731 8.7,110.348 cw(c11.24,110.348) 9.444,112.144 9.671,112.371 cw(c11.467,110.575) 11.467,113.115 L9_DES_0.2@13.5,113.115 ccw(c13.778,113.393) 13.778,113 D2_DES_0.5@16.083,113 D2_DES_0.6@16.918,113 ccw(c16.917,115.396) 18.612,113.702 J1.3@19,114.09
PoC_D_DES_1: C6_DES_1.2 D2_DES_1.5 D2_DES_1.6 J2.3 L9_DES_1.2 | length 29
  Bottom Layer w0.199: C6_DES_1.2@51.101,95.278 47.444,98.935 cw(c49.24,100.731) 46.7,100.731 46.7,110.348 cw(c49.24,110.348) 47.444,112.144 47.671,112.371 cw(c49.467,110.575) 49.467,113.115 L9_DES_1.2@51.5,113.115 ccw(c51.778,113.393) 51.778,113 D2_DES_1.5@54.083,113 D2_DES_1.6@54.918,113 ccw(c54.918,115.396) 56.612,113.702 J2.3@57,114.09
PoC_PWR_DES_0: F1_DES_0.1 F2_DES_0.1 F3_DES_0.1 F4_DES_0.1
  other v3: 20,103.25 21,103.25 22,103.25
PoC_PWR_DES_1: F1_DES_1.1 F2_DES_1.1 F3_DES_1.1 F4_DES_1.1
  other v3: 58,103.25 59,103.25 60,103.25
POWER_EN: J?.237@392.9,20.375
PRE_CLK_N: C?.2@329.479,223 J?.53@374.1,216.75
PRE_CLK_P: C?.2@325.479,223 J?.55@374.1,217.25
PRE_CSI0_D1_N: D?.1@393.583,170 D?.10@394.418,170 J?.16@317.1,77.625 R?.1@237.5,88
PRE_CSI0_D1_P: D?.2@393.583,169.5 D?.9@394.418,169.5 J?.18@317.1,77.125 R?.1@233.5,88
PRE_CSI1_D0_N: D?.1@428.583,170 D?.10@429.418,170 J?.3@78.5,55 R?.1@228.5,88
PRE_CSI1_D0_P: D?.2@428.583,169.5 D?.9@429.418,169.5 J?.5@78,55 R?.1@224.5,88
PRE_FAN_PWM_FAN_IF_0: J?_FAN_IF_0.4 Q?_FAN_IF_0.3@201,308.95 R?_FAN_IF_0.2@236,308.65
PRE_FAN_PWM_FAN_IF_1: J?_FAN_IF_1.4 Q?_FAN_IF_1.3@201,322.95 R?_FAN_IF_1.2@234,322.65
PRE_FAN_TACH_FAN_IF_0: J?_FAN_IF_0.3 Q?_FAN_IF_0.3@308,308.95 R?_FAN_IF_0.2@325,308.65
PRE_FAN_TACH_FAN_IF_1: J?_FAN_IF_1.3 Q?_FAN_IF_1.3@304,322.95 R?_FAN_IF_1.2@321,322.65
PRE_PCIE_32K_CLK: J?.210@429.1,27.125 U?.2@446.23,169
PRE_PCIE_WAKE: J?.54@392.65,217 R?.1@306.5,224
PRE_TX0_N: C?.2@401.479,223 J?.47@374.1,215.25
PRE_TX0_P: C?.2@396.479,223 J?.49@374.1,215.75
PRE_TX1_N: C?.2@409.479,223 J?.35@349.45,189.25
PRE_TX1_P: C?.2@405.479,223 J?.37@374.1,212.75
PRE_TX2_N: C?.2@418.479,223 J?.23@349.45,186.25
PRE_TX2_P: C?.2@414.479,223 J?.25@349.45,186.75
PRE_TX3_N: C?.2@427.479,223 J?.11@349.45,183.25
PRE_TX3_P: C?.2@422.479,223 J?.13@349.45,183.75
RAIL_ENABLE_RAIL_DISCH_0: Q?_RAIL_DISCH_0.2@183,333.05
RAIL_ENABLE_RAIL_DISCH_1: Q?_RAIL_DISCH_1.2@183,348.05
RAIL_ENABLE_RAIL_DISCH_2: Q?_RAIL_DISCH_2.2@183,363.05
RAIL_RAIL_DISCH_0: C?.1@223.198,5 C?.2@214.367,5 R?.2@229.725,5 R?_FAN_IF_0.1@236,307.35 R?_FAN_IF_0.1@325,307.35 R?_FAN_IF_0.1@520.001,307.5 R?_FAN_IF_0.2@502.001,308.5 R?_FAN_IF_1.1@234,321.35 R?_FAN_IF_1.1@321,321.35 R?_FAN_IF_1.1@511.001,322.5 R?_FAN_IF_1.2@493.001,323.5 R?_RAIL_DISCH_0.2@253,338.625 U?.4@239.125,3.35
RAIL_RAIL_DISCH_1: C?.1@240.199,223 C?.1@245.199,223 C?.1@250.199,223 C?.2@213.367,224 C?.2@218.367,224 C?.2@222.367,224 C?.2@226.367,224 C?.2@231.367,224 C?.2@235.367,224 D?.2@276.55,222.2 F5_DES_0.1 F5_DES_1.1 J?.2@370.65,204 J?.4@370.65,204.5 J?.12@370.65,206.5 J?.14@370.65,207 J?.16@370.65,207.5 J?.18@370.65,208 J?.70@392.65,221 J?.72@392.65,221.5 J?.74@392.65,222 R?.1@195.5,6 R?.1@199.5,224 R?.2@196.65,170 R?.2@213.65,170 R?.2@251.65,170 R?.2@268.65,170 R?.2@277.725,5 R?.2@282.65,224 R?.2@286.65,170 R?.2@451.65,170 R?_RAIL_DISCH_1.2@252,353.625 U?.4@297.125,3.35
RAIL_RAIL_DISCH_2: C?.2@217.367,170 R?_RAIL_DISCH_2.2@253,368.625 U?.3@236.05,164.7
REC_VBUS: C?.1@205.525,259 C?.2@201.367,260 J?.1@213.175,255.7 Q?.1@187.05,259.65 R?.2@183.725,260
SIOA_DES_0_N: C3_DES_0.1 U1_DES_0.22 | length 4.5
  Bottom Layer w0.163: U1_DES_0.22@23.917,94.063 24.181,94.327 24.278,94.327 24.595,94.645 26.949,94.645 27.316,95.012 27.316,95.147 27.162,95.302 C3_DES_0.1@27.162,95.662
SIOA_DES_0_P: C1_DES_0.1 U1_DES_0.23 | length 4.5
  Bottom Layer w0.163: U1_DES_0.23@24.27,93.71 24.534,93.974 24.534,94.07 24.746,94.282 27.099,94.282 27.573,94.755 27.708,94.755 27.862,94.601 C1_DES_0.1@28.222,94.601
SIOA_DES_1_N: C3_DES_1.1 U1_DES_1.22 | length 4.5
  Bottom Layer w0.163: U1_DES_1.22@61.917,94.063 62.181,94.327 62.278,94.327 62.595,94.645 64.949,94.645 65.316,95.012 65.316,95.147 65.162,95.302 C3_DES_1.1@65.162,95.662
SIOA_DES_1_P: C1_DES_1.1 U1_DES_1.23 | length 4.5
  Bottom Layer w0.163: U1_DES_1.23@62.27,93.71 62.534,93.974 62.534,94.07 62.746,94.282 65.099,94.282 65.573,94.755 65.708,94.755 65.862,94.601 C1_DES_1.1@66.222,94.601
SIOB_DES_0_N: C4_DES_0.1 U1_DES_0.19 | length 4.1
  Bottom Layer w0.163: U1_DES_0.19@22.856,95.124 23.12,95.388 23.12,95.485 23.664,96.029 23.664,96.968 24.497,97.801 24.632,97.801 24.786,97.646 25.146,97.646 C4_DES_0.1@25.162,97.662
SIOB_DES_0_P: C2_DES_0.1 U1_DES_0.18 | length 4.1
  Bottom Layer w0.163: U1_DES_0.18@22.503,95.477 22.767,95.742 22.863,95.742 23.301,96.179 23.301,97.118 24.24,98.058 24.24,98.193 24.086,98.347 24.086,98.707 C2_DES_0.1@24.101,98.722
SIOB_DES_1_N: C4_DES_1.1 U1_DES_1.19 | length 4.1
  Bottom Layer w0.163: U1_DES_1.19@60.856,95.124 61.12,95.388 61.12,95.485 61.664,96.029 61.664,96.968 62.497,97.801 62.632,97.801 62.786,97.646 63.146,97.646 C4_DES_1.1@63.162,97.662
SIOB_DES_1_P: C2_DES_1.1 U1_DES_1.18 | length 4.1
  Bottom Layer w0.163: U1_DES_1.18@60.503,95.477 60.767,95.742 60.863,95.742 61.301,96.179 61.301,97.118 62.24,98.058 62.24,98.193 62.086,98.347 62.086,98.707 C2_DES_1.1@62.101,98.722
SIOC_DES_0_N: C7_DES_0.1 U1_DES_0.9 | length 4.3
  Bottom Layer w0.163: C7_DES_0.1@16.838,97.662 16.854,97.646 17.214,97.646 17.368,97.801 17.503,97.801 18.159,97.145 18.159,95.498 18.526,95.131 18.526,95.034 U1_DES_0.9@18.79,94.77
SIOC_DES_0_P: C5_DES_0.1 U1_DES_0.10 | length 4.3
  Bottom Layer w0.163: C5_DES_0.1@17.899,98.722 17.914,98.707 17.914,98.347 17.76,98.193 17.76,98.058 18.522,97.295 18.522,95.649 18.783,95.388 18.88,95.388 U1_DES_0.10@19.144,95.124
SIOC_DES_1_N: C7_DES_1.1 U1_DES_1.9 | length 4.3
  Bottom Layer w0.163: C7_DES_1.1@54.838,97.662 54.854,97.646 55.214,97.646 55.368,97.801 55.503,97.801 56.159,97.145 56.159,95.498 56.526,95.131 56.526,95.034 U1_DES_1.9@56.79,94.77
SIOC_DES_1_P: C5_DES_1.1 U1_DES_1.10 | length 4.3
  Bottom Layer w0.163: C5_DES_1.1@55.899,98.722 55.914,98.707 55.914,98.347 55.76,98.193 55.76,98.058 56.522,97.295 56.522,95.649 56.783,95.388 56.88,95.388 U1_DES_1.10@57.144,95.124
SIOD_DES_0_N: C8_DES_0.1 U1_DES_0.6 | length 4.3
  Bottom Layer w0.163: C8_DES_0.1@14.838,95.662 14.838,95.388 14.641,95.191 14.641,95.055 15.258,94.439 16.904,94.439 17.369,93.974 17.466,93.974 U1_DES_0.6@17.73,93.71
SIOD_DES_0_P: C6_DES_0.1 U1_DES_0.5 | length 4.3
  Bottom Layer w0.163: C6_DES_0.1@13.778,94.601 14.051,94.601 14.249,94.799 14.384,94.799 15.107,94.075 16.754,94.075 17.112,93.717 17.112,93.62 U1_DES_0.5@17.376,93.356
SIOD_DES_1_N: C8_DES_1.1 U1_DES_1.6 | length 4.3
  Bottom Layer w0.163: C8_DES_1.1@52.838,95.662 52.838,95.388 52.641,95.191 52.641,95.055 53.258,94.439 54.904,94.439 55.369,93.974 55.466,93.974 U1_DES_1.6@55.73,93.71
SIOD_DES_1_P: C6_DES_1.1 U1_DES_1.5 | length 4.3
  Bottom Layer w0.163: C6_DES_1.1@51.778,94.601 52.051,94.601 52.249,94.799 52.384,94.799 53.107,94.075 54.754,94.075 55.112,93.717 55.112,93.62 U1_DES_1.5@55.376,93.356
SLEEP/nWAKE: J?.240@429.1,19.625 R?.2@329.725,170
SMB_CLK: J?.40@392.65,213.5 R?.1@298.5,224 TP?.1@344,224
SMB_DATA: J?.42@392.65,214 R?.1@302.5,224 TP?.1@339,224
SMB_nALERT: J?.44@392.65,214.5 R?.1@289.5,224 R?.1@294.35,224 TP?.1@333,224
SUSCLK_32: R?.1@203.5,224 R?.1@285.5,224 R?.2@321.725,224
UART2_RXD: J?.238@429.1,20.125 Q?.2@263.05,86.35 R?.1@272.35,88
UART2_TXD: J?.236@429.1,20.625 Q?.2@246.05,86.35 R?.1@254.35,88
USB0_D_N: D?.1@437.583,170 D?.10@438.418,170 J?.109@336.9,54.375
USB0_D_P: D?.2@437.583,169.5 D?.9@438.418,169.5 J?.111@336.9,53.875
USB1_D_N: D?.4@437.583,168.5 D?.7@438.418,168.5 J?.115@336.9,52.875
USB1_D_P: D?.5@437.583,168 D?.6@438.418,168 J?.117@336.9,52.375
USBSS0_RX_N: D?.4@341.583,168.5 D?.7@342.418,168.5 J?.161@392.9,39.375
USBSS0_RX_P: D?.5@341.583,168 D?.6@342.418,168 J?.163@392.9,38.875
USBSS0_TX_N: D?.4@345.583,168.5 D?.7@346.418,168.5 J?.166@429.1,38.125
USBSS0_TX_P: D?.5@345.583,168 D?.6@346.418,168 J?.168@429.1,37.625
VBUS_DETECT: J?.87@336.9,59.875
VDD_3V3_HDMI: Q?.1@233.05,4.65 R?.1@200.375,6 R?.1@348.5,6 R?.2@219.65,6 R?.2@285.725,6 R?.2@439.5,6 U?.2@294.875,4 U?.3@294.875,3.35
VDD_5V_HDMI: C?.1@209.198,5 C?.2@205.367,5 J?.18@191.92,186.71 R?.2@426.625,6 R?.2@465.625,6 U?.2@236.875,4 U?.3@236.875,3.35
WIFI_3V3: J?.72@209.65,246.5 J?.74@209.65,247
X25_DES_0_N: C10_DES_0.2 U1_DES_0.16 Y1_DES_0.3 | length 8.8
  Bottom Layer w0.2: U1_DES_0.16@21.795,96.185 22.053,96.442 22.053,96.591 22.353,96.892 22.353,97.672 21.078,98.948 21.078,100.033 21.195,100.15 21.6,100.15 Y1_DES_0.3@22.1,99.65 ; Y1_DES_0.3@22,99.5 22.05,99.5 22.7,100.15 22.7,100.2 24,101.5 C10_DES_0.2@24.021,101.5
X25_DES_0_P: C9_DES_0.2 U1_DES_0.15 Y1_DES_0.1 | length 8
  Bottom Layer w0.2: C9_DES_0.2@17.979,101.5 Y1_DES_0.1@20,101.5 ; Y1_DES_0.1@20,101.35 20.791,100.559 20.791,100.154 20.789,100.153 20.789,98.828 22.065,97.553 22.065,97.012 21.848,96.795 21.699,96.795 U1_DES_0.15@21.442,96.538
X25_DES_1_N: C10_DES_1.2 U1_DES_1.16 Y1_DES_1.3 | length 8.8
  Bottom Layer w0.2: U1_DES_1.16@59.795,96.185 60.053,96.442 60.053,96.591 60.353,96.892 60.353,97.672 59.078,98.948 59.078,100.033 59.195,100.15 59.6,100.15 Y1_DES_1.3@60.1,99.65 ; Y1_DES_1.3@60,99.5 60.05,99.5 60.7,100.15 60.7,100.2 62,101.5 C10_DES_1.2@62.021,101.5
X25_DES_1_P: C9_DES_1.2 U1_DES_1.15 Y1_DES_1.1 | length 8
  Bottom Layer w0.2: C9_DES_1.2@55.979,101.5 Y1_DES_1.1@58,101.5 ; Y1_DES_1.1@58,101.35 58.791,100.559 58.791,100.154 58.789,100.153 58.789,98.828 60.065,97.553 60.065,97.012 59.848,96.795 59.699,96.795 U1_DES_1.15@59.442,96.538